# Altium PCB diban1.PcbDoc (part 2 of 2)
Units mil, origin at the board's own origin, x right, y up, seen from the top; angles counter-clockwise.
Board outline 3145.03 x 2732.03 mil, 2 copper layers (Top Layer, Bottom Layer); 163 components, 145 nets, 662 pads, 182 vias.
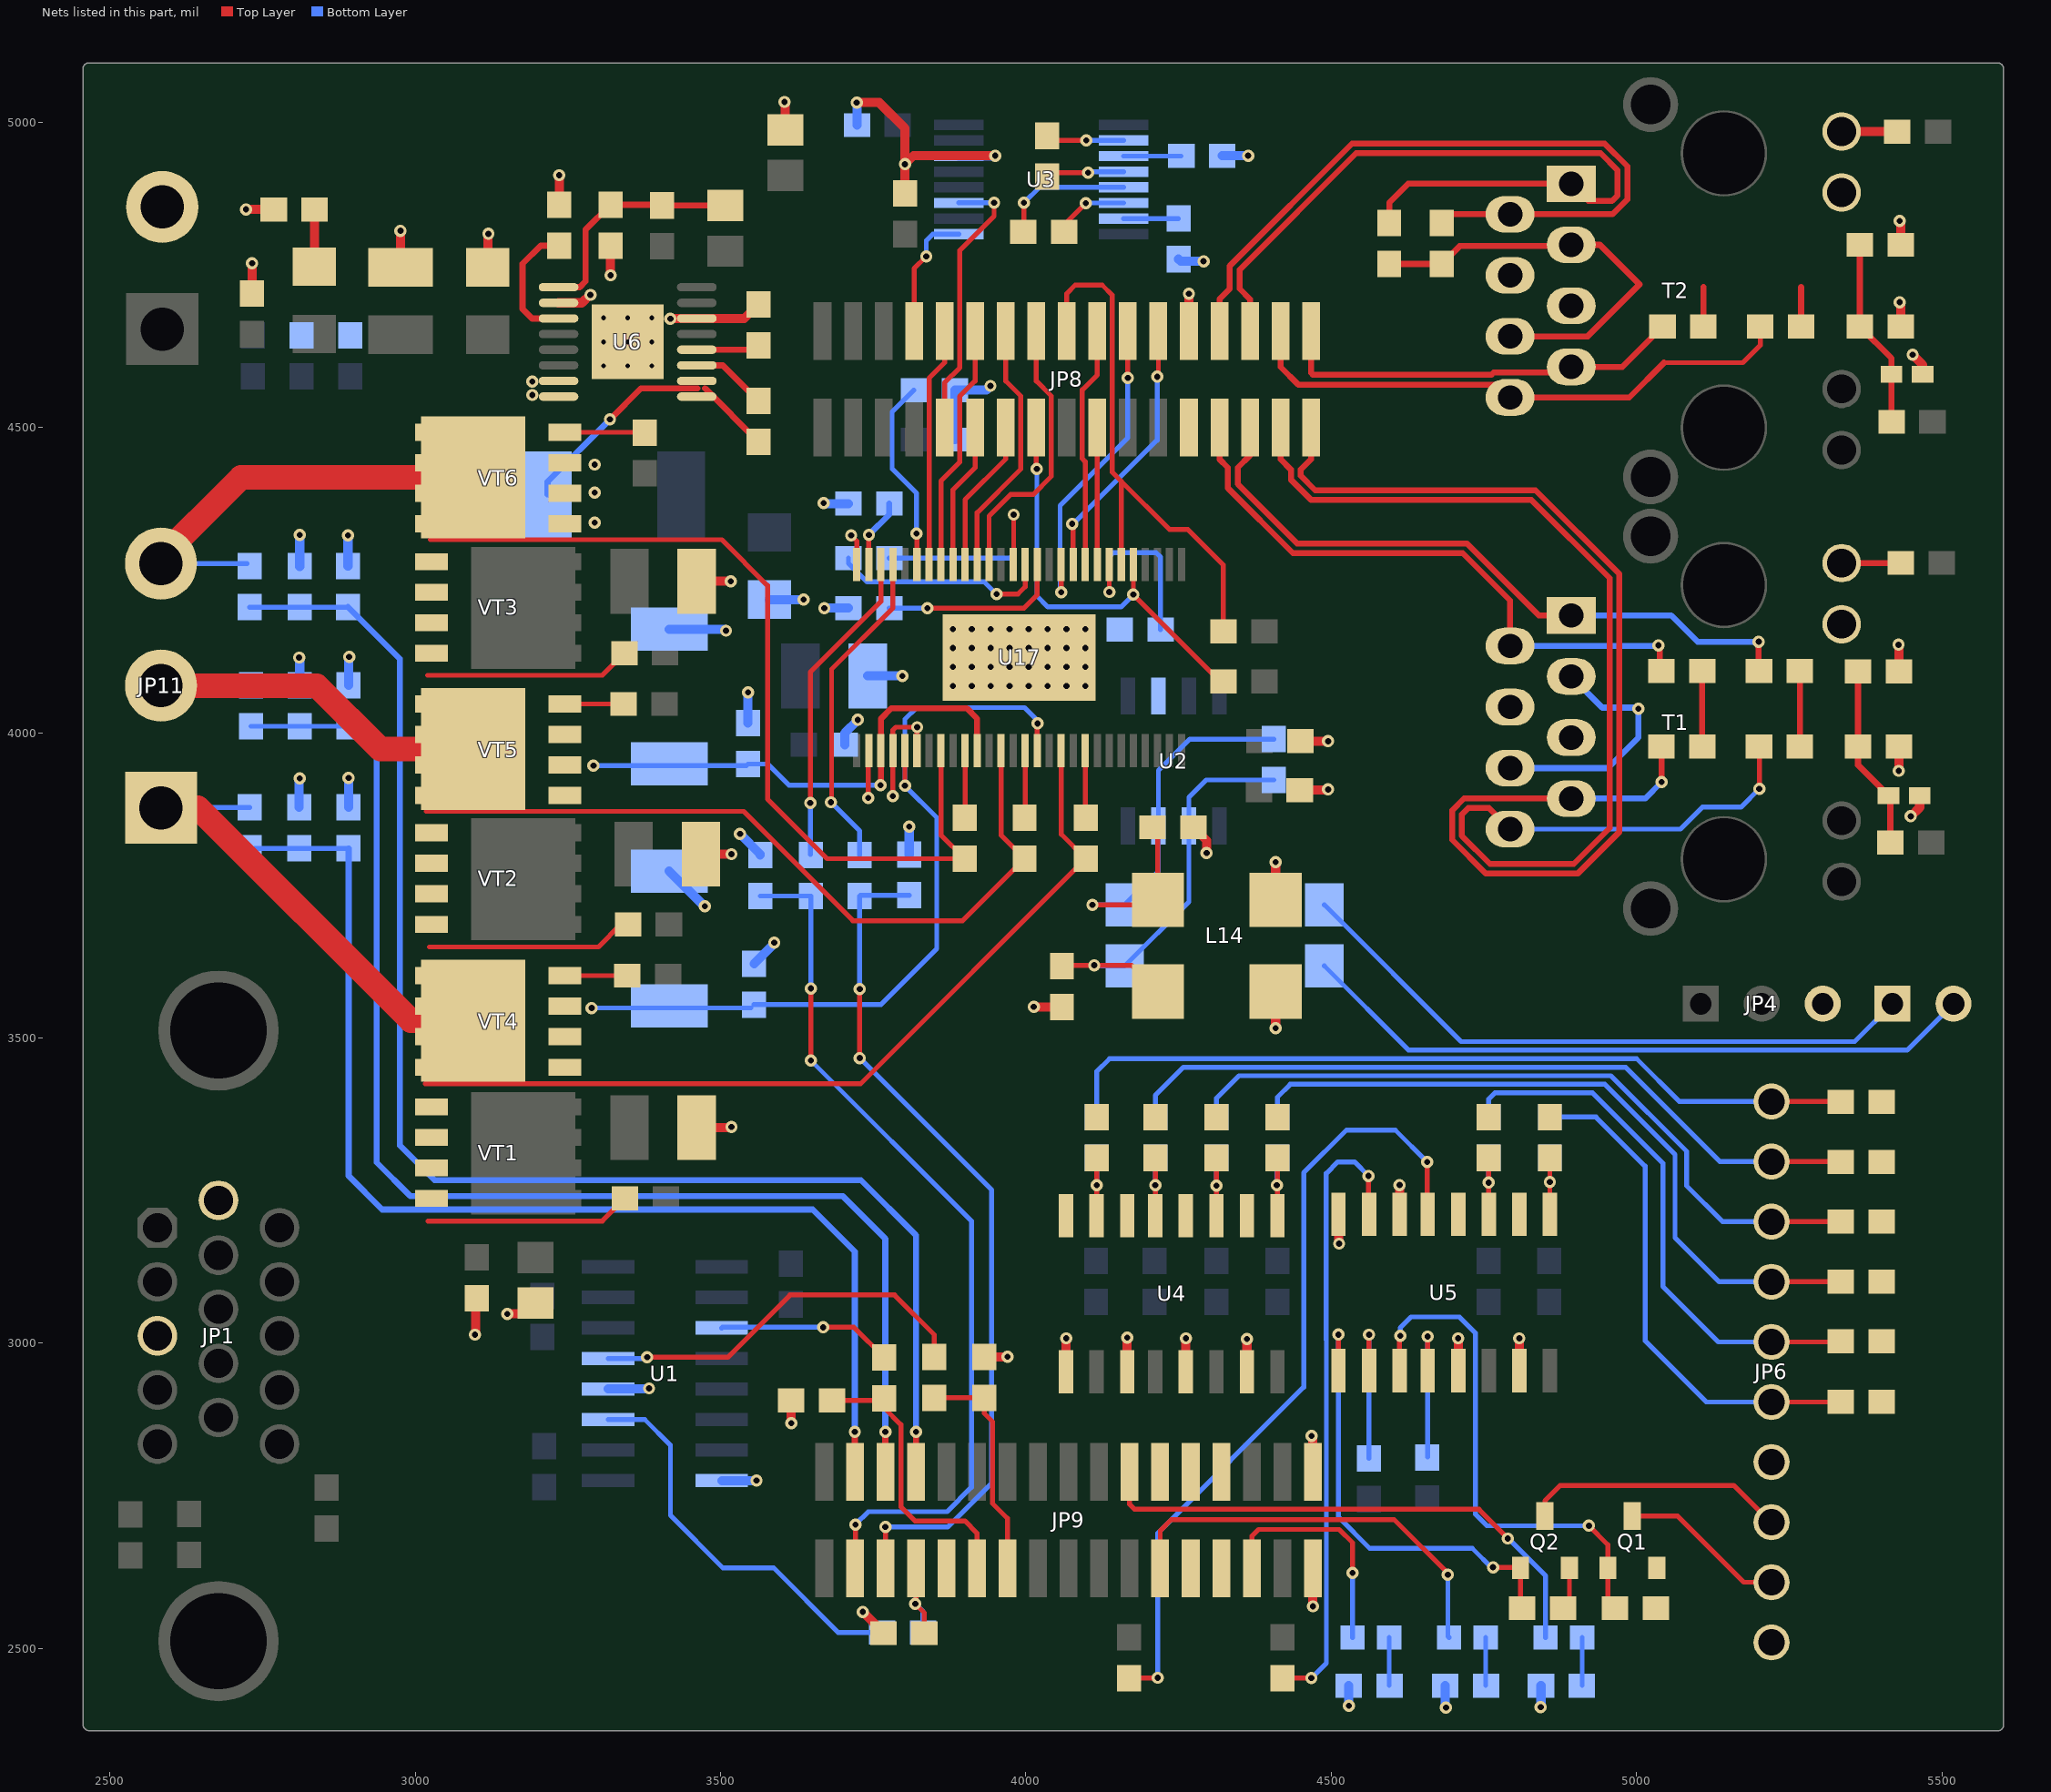
[diagram p2: the nets of this part, all layers, seen from the top]

## Via types
v1: diameter 20, hole 10, Top Layer to Bottom Layer, 167 vias
v2: diameter 40, hole 20, Top Layer to Bottom Layer, 15 vias

## Nets (pads, with @x,y where several pads share a name; then routed paths per layer and width w, separated by ;. In a path a pad name is that pad's centre, name@x,y a point inside that pad or via, vN(x,y) a via of type N, cw(c..) or ccw(c..) an arc to the next point about the centre after c; other vN are vias at no path point) (continued)
GND: C1.1 C2.1 C3.1 C4.2 C5.1 C6.1 C7.1 C8.1 C9.1 C10.2 C11.1 C12.2 C14.1 C15.1 C17.2 C18.2 C19.2 C22.1 C23.1 C26.1 C28.1 C29.1 C30.1 C31.1 C42.1 C43.1 C44.2 C45.2 C46.2 C47.2 C48.2 C49.1 C50.1 C51.1 C52.1 C53.1 C54.1 C57.1 C58.1 C65.1 C66.1 C67.1 C68.1 D1.1 D2.1 JP1.3 JP1.6 JP4.3 JP5.2 JP8.25 JP8.26 JP9.1 JP9.2 R48.2 R54.1 R55.1 R56.1 R60.1 R61.1 R70.1 R71.1 R73.1 R75.1 R77.1 R80.1 T1.4 T1.5 T1.10 T2.4 T2.5 T2.10 U1.8 U1.12 U2.2 U3.14 U4.9 U4.11 U4.13 U4.15 U5.6 U5.8 U5.13 U5.15 U6.6 U6.10 U6.15 U6.16 U6.17 U17.28 U17.30 U17.32 U17.34 U17.57 VT6.1 | length 4260.1
  Top Layer w8: v1(3714,4323) 3723.25,4313.75 U17.28@3723.25,4275.5 ; v1(3742,3893) 3742,3969.56 U17.30@3742.94,3970.5 ; v1(3782,3896) 3782,3927 3782.31,3927.31 U17.32@3782.31,3970.5 3782.31,4004.31 3787,4009 v1(3822,4009) 3821.68,4008.68 U17.34@3821.68,3970.5
  Top Layer w15: v1(2723,4857) C54.1@2768.54,4857 ; C53.1@2733,4719.46 v1(2733,4769) ; C17.2@2976,4762.12 v1(2976,4822) ; v1(3098,3014) 3099,3015 3099,3071.54 C3.1@3101,3073.54 ; C18.2@3119,4762.12 3119,4816 v1(3120,4817) ; v1(3151,3048) 3179.4,3048 C58.1@3197,3065.6 ; U6.10@3234.81,4703.98 3272.98,4703.98 3286,4717 v1(3287,4717) ; C57.1@3236,4864.46 v1(3236,4913) ; v1(3320,4749) R48.2@3320,4797.54 ; v1(3418,4678) 3418.39,4678.39 U6.6@3461.19,4678.39 3538.93,4678.39 C19.2@3562,4701.46 ; C44.2@3461.12,3353 3517,3353 v1(3518,3354) ; C46.2@3461.12,4248 v1(3517,4248) ; C45.2@3468.12,3801 v1(3518,3801) ; v1(3605,5033) 3606,5032 C22.1@3606,4987.4 ; C4.2@3615.54,2906 3615.54,2869.46 v1(3616,2869) ; v1(3723,5032) 3760,5032 3802,4990 v1(3802,4931) ; v1(3733,2560) 3766.67,2526.33 C6.1@3766.67,2525 ; C7.1@3802,4883.46 v1(3802,4931) ; C5.1@3932,2977.46 3969.46,2977.46 v1(3970,2978) ; v1(3949.77,4945) 3816,4945 v1(3802,4931) ; v1(4013,3551) 4013.46,3550.54 C11.1@4059,3550.54 ; U4.9@4065.94,2953.09 4065.94,3007.94 v1(4066,3008) ; U4.11@4165.94,2953.09 4165.94,3008.94 v1(4166,3009) ; U4.13@4262,2953.09 v1(4262,3008) ; JP8.26@4267,4658 v1(4267,4719) ; C10.2@4274.46,3845 4296,3823.46 v1(4296,3803) ; U4.15@4362,2953.09 v1(4362,3007) ; v1(4409,3516) D2.1@4409,3576 ; D1.1@4409,3726 v1(4409,3788) ; C9.1@4448.46,3906 4494,3906 v1(4495,3907) ; C8.1@4449.46,3986 v1(4495,3986) ; v1(4468,2848) 4470,2846 JP9.1@4470,2789 ; v1(4470,2569) JP9.2@4470,2631 ; U5.8@4511.94,3211 4511.94,3164.06 v1(4513,3163) ; U5.6@4611.94,3211 v1(4611.94,3259.06) ; U5.13@4708,2955.09 v1(4708,3008) ; U5.15@4808,2955.09 v1(4808,3008) ; v1(5429,4144) 5429.46,4143.54 C1.1@5429.46,4100 ; v1(5429.46,3937.46) C67.1@5429.46,3977 ; v1(5431,4705) 5432.46,4703.54 C68.1@5432.46,4665 ; v1(5431,4838) 5432.46,4836.54 C2.1@5432.46,4799 ; v1(5449,3863) 5463.59,3877.59 C65.1@5463.59,3897 ; v1(5452,4619) 5468.59,4602.41 C66.1@5468.59,4587
  Bottom Layer w15: R73.1@2810,3877.46 2810,3924 v1(2811,3925) ; v1(2810,4123) 2811,4122 R75.1@2811,4077.46 ; R77.1@2811,4272.46 v1(2811,4324) ; C51.1@2890,4272.6 v1(2890,4323) ; C49.1@2891,3877.46 v1(2891,3926) ; C50.1@2891,4077.46 2891,4123 v1(2892,4124) ; v1@3286.08,4717.92 v1(3287,4717) ; U1.12@3316,2925 3382,2925 v1(3383,2926) ; R70.1@3416,3773.24 3474.24,3715 v1(3474.24,3715.76) ; R71.1@3416,4169.24 3506.76,4169.24 v1(3509,4167) ; U1.8@3502,2775 v1(3559,2775) ; v1(3532,3834) 3565,3801 C30.1@3565,3799.46 ; C48.2@3545,4015.46 v1(3545,4066) ; C47.2@3555,3621.46 3588,3654.46 v1(3588,3656) ; C23.1@3580,4217.88 3635.88,4217.88 v1(3636,4218) ; v1(3669,4376) 3670,4375 C29.1@3709.4,4375 ; v1(3670,4204) C26.1@3709.54,4204 ; C42.1@3703.46,3980 3703.46,3999.46 v1(3725,4021) ; v1(3723,5032) 3723.4,5031.6 C14.1@3723.4,4995 ; C43.1@3741.12,4093 v1(3798,4093) ; C31.1@3809,3800.6 v1(3809,3846) ; R60.1@3883.46,4480 3883.6,4480.13 C28.1@3883.6,4561 3935,4561 v1(3942,4568) ; U3.14@3890,4944.39 3950.39,4944.39 v1(3949.77,4945) ; C12.2@4250,4775.54 4253.54,4772 v1(4291,4772) ; C15.1@4321.6,4945 v1(4364,4945) ; R54.1@4528.54,2439 4528.54,2406.46 v1(4529,2406) ; R55.1@4686.54,2439 4686.54,2404.46 v1(4688,2403) ; v1(4843,2404) 4843.54,2404.54 R56.1@4843.54,2439
  other v1: 3294,4344 3294,4393 3294,4439 3192,4553 3192,4575
GND1: C59.1 C60.1 C61.1 C62.1 C63.2 C64.2 JP6.4 R32.2 R33.2 R34.2 R35.2 R36.1 R37.1 U4.2 U4.4 U4.6 U4.8 U5.2 U5.4
GND2: JP6.1 Q1.2 Q2.2 R85.2 R86.2 | length 70.4
  Top Layer w8: R86.2@4879.46,2566 4890,2576.54 Q2.2@4890,2632
IA: C31.2 JP9.30 R62.1 | length 1400.7
  Top Layer w8: v1(3728,3467) v1(3728,3580) ; JP9.30@3770,2633 v1(3770,2699)
  Bottom Layer w8: v1(3728,3467) 3944,3251 3944,2771 3872,2699 v1(3770,2699) ; v1(3728,3580) R62.1@3728,3732.54 ; R62.1@3729.13,3733.67 C31.2@3809,3733.67
IB: C30.2 JP9.32 R63.1 | length 1446.7
  Top Layer w8: v1(3648,3463) v1(3648,3581) ; JP9.32@3721,2632 v1(3721,2703)
  Bottom Layer w8: C30.2@3565,3732.54 R63.1@3648,3732.54 v1(3648,3581) ; v1(3648,3463) 3911,3200 3911,2764 3871,2724 3742,2724 v1(3721,2703)
INH_A: JP8.16 U17.17 | length 456.5
  Top Layer w8: U17.17@3939.79,4275.5 3939.79,4354.79 3975,4390 4012,4390 4041.57,4419.57 4041.57,4551.39 4017,4575.95 JP8.16@4017,4658
INH_B: JP8.13 U17.19 | length 252.1
  Top Layer w8: U17.19@3900.42,4275.5 3900.42,4381.42 3967,4448 JP8.13@3967,4500
INH_C: JP8.12 U17.21 | length 405.7
  Top Layer w8: U17.21@3861.05,4275.5 3861.05,4412.24 3891.57,4442.76 3891.57,4550.52 3917,4575.95 JP8.12@3917,4658
INL_A: JP8.14 U17.18 | length 422.3
  Top Layer w8: U17.18@3920.1,4275.5 3920.1,4360.1 3991.57,4431.57 3991.57,4551.39 3967,4575.95 JP8.14@3967,4658
INL_B: JP8.11 U17.20 | length 239.5
  Top Layer w8: U17.20@3880.73,4275.5 3880.73,4397.73 3917,4434 JP8.11@3917,4500
INL_C: JP8.10 U17.22 | length 392.8
  Top Layer w8: U17.22@3841.57,4275.7 3841.57,4580.57 3867,4606 JP8.10@3867,4658
INPUT1: C59.2 JP6.7 R46.2 | length 1177.6
  Top Layer w8: JP6.7@5221,3100.55 5334.09,3100.55 C59.2@5334.54,3101
  Bottom Layer w8: R46.2@4412,3370.46 4412,3403 4433,3424 4948,3424 5063,3309 5063,3173 5135.45,3100.55 JP6.7@5221,3100.55
INPUT2: C60.2 JP6.8 R23.2 | length 1200.2
  Top Layer w8: JP6.8@5221,3198.98 C60.2@5334.54,3199
  Bottom Layer w8: R23.2@4312,3370.46 4312,3401 4349,3438 4958,3438 5082,3314 5082,3258 5141.02,3198.98 JP6.8@5221,3198.98
INPUT3: C61.2 JP6.9 R24.2 | length 1240.8
  Top Layer w8: JP6.9@5221,3297.4 C61.2@5334.13,3297.4
  Bottom Layer w8: R24.2@4212,3370.46 4212,3406 4258,3452 4982,3452 5136.6,3297.4 JP6.9@5221,3297.4
INPUT4: C62.2 JP6.10 R25.2 | length 1330
  Top Layer w8: JP6.10@5221,3395.83 C62.2@5333.71,3395.83
  Bottom Layer w8: R25.2@4116,3370.46 4116,3445 4137,3466 5000,3466 5070.17,3395.83 JP6.10@5221,3395.83
INPUT5: C63.1 JP6.5 R30.2 | length 837.1
  Top Layer w8: JP6.5@5221,2903.7 C63.1@5334.24,2903.7
  Bottom Layer w8: R30.2@4858,3370.46 4933.54,3370.46 5014,3290 5014,3004 5114.3,2903.7 JP6.5@5221,2903.7
INPUT6: C64.1 JP6.6 R31.2 | length 896.6
  Top Layer w8: JP6.6@5221,3002.13 C64.1@5333.66,3002.13
  Bottom Layer w8: R31.2@4758,3370.46 4758,3400 4768,3410 4928,3410 5043,3295 5043,3093 5133.87,3002.13 JP6.6@5221,3002.13
LED1: JP9.6 LED1.1 | length 386.7
  Top Layer w8: JP9.6@4370,2631 4370,2684 4381,2695 4513,2695 4535,2673 v1(4535,2624)
  Bottom Layer w8: LED1.1@4535,2518 v1(4535,2624)
LED2: JP9.12 LED2.1 | length 685.6
  Top Layer w8: JP9.12@4220,2631 4220,2693 4238,2711 4603,2711 4693,2621 v1(4691,2621)
  Bottom Layer w8: v1(4691,2621) 4691,2520 LED2.1@4693,2518
LED3: JP9.13 LED3.1 | length 884
  Top Layer w8: JP9.13@4170,2789 4170,2736 4178,2728 4742,2728 4789,2681 v1(4789,2680)
  Bottom Layer w8: v1(4789,2680) 4790,2680 4851,2619 LED3.1@4851,2518
MCU_TCK: JP9.7
MCU_TDI: JP9.11
MCU_TDO: JP9.8
MCU_TMS: JP9.10
MCU_TRST: JP9.9
NetC10_1: C10.1 D1.2 L14.2 R22.2 U2.7 | length 727.7
  Top Layer w8: v1(4109,3718) D1.2@4208.09,3718 ; C10.1@4207.54,3845 4216.09,3836.45 D1.2@4216.09,3726
  Bottom Layer w8: v1(4109,3718) L14.2@4162,3718 4217,3773 U2.7@4217,3847.4 4217,3938 4268.46,3989.46 R22.2@4406,3989.46
NetC11_2: C11.2 D2.2 L14.1 R22.1 U2.6 | length 696.1
  Top Layer w8: C11.2@4060.54,3619 v1(4112,3619) 4173.09,3619 D2.2@4216.09,3576
  Bottom Layer w8: v1(4112,3619) 4111,3618 L14.1@4162,3618 4267,3723 U2.6@4267,3847.4 4267,3894 4295.54,3922.54 R22.1@4406,3922.54
NetC12_1: C12.1 U3.7 | length 89.6
  Bottom Layer w8: U3.7@4160,4842.02 C12.1@4249.56,4842.02
NetC13_1: C13.1 U3.2 | length 128.1
  Top Layer w8: C13.1@4035,4977.46 4042.46,4970 v1(4099,4970)
  Bottom Layer w8: v1(4099,4970) U3.2@4160,4969.98
NetC13_2: C13.2 U3.4 | length 128.4
  Top Layer w8: C13.2@4035,4910.54 4041.46,4917 v1(4102,4917)
  Bottom Layer w8: v1(4102,4917) 4103.8,4918.8 U3.4@4160,4918.8
NetC15_2: C15.2 U3.3 | length 94.1
  Bottom Layer w8: U3.3@4160,4944.39 C15.2@4254.06,4944.39
NetC16_1: C16.1 U3.5 | length 222
  Top Layer w8: C16.1@3995.54,4820 3997,4821.46 v1(3997,4868)
  Bottom Layer w8: v1(3997,4868) 4022.2,4893.2 U3.5@4160,4893.2
NetC16_2: C16.2 U3.6 | length 124
  Top Layer w8: C16.2@4062.46,4820 4062.46,4831.46 v1(4098,4867)
  Bottom Layer w8: v1(4098,4867) 4098.61,4867.61 U3.6@4160,4867.61
NetC19_1: C19.1 U6.4 | length 103.8
  Top Layer w10: U6.4@3461.19,4627.2 3554.66,4627.2 C19.1@3562,4634.54
NetC20_1: C20.1 U6.3 | length 151.5
  Top Layer w10: U6.3@3434.61,4601.61 U6.3@3461.19,4601.61 3503.85,4601.61 C20.1@3562,4543.46
NetC20_2: C20.2 L1.1 U6.1 U6.2 | length 453.1
  Top Layer w10: v1(3319,4513) 3370,4564 3462,4564 ; 3474.54,4564 C20.2@3562,4476.54
  Bottom Layer w10: L1.1@3217,4390 3217,4411 v1(3319,4513)
NetC21_1: C21.1 R47.2 R48.1 U6.9 | length 377.5
  Top Layer w10: U6.9@3234.81,4729.57 3269.57,4729.57 3279,4739 3279,4823.46 R48.1@3320,4864.46 R47.2@3403,4864.46 ; R47.2@3404,4863.46 C21.1@3507.94,4863.46
NetC26_2: C26.2 U17.13 | length 300.9
  Top Layer w8: v1(3839,4204) 3839.06,4204.06 3997,4204.06 4018.53,4225.59 U17.13@4018.53,4275.5
  Bottom Layer w8: C26.2@3776.46,4204 v1(3839,4204)
NetC27_1: C27.1 U17.15 | length 352.9
  Top Layer w8: U17.15@3979.16,4275.5 3980,4276.34 v1(3980,4357)
  Bottom Layer w8: C27.1@3776.46,4286 3974,4286 3980,4292 v1(3980,4357)
NetC27_2: C27.2 U17.14 | length 360.3
  Top Layer w8: v1(3952,4227) 3987,4227 3998.84,4238.84 U17.14@3998.84,4275.5
  Bottom Layer w8: C27.2@3709.54,4286 3709.54,4277.46 3740,4247 3932,4247 v1(3952,4227)
NetC28_2: C28.2 U17.23 | length 318.5
  Top Layer w8: U17.23@3821.68,4275.5 v1@3821.68,4327.65
  Bottom Layer w8: C28.2@3816.67,4561 3781,4525.33 3781,4432 3821,4392 v1(3821,4326)
NetC29_2: C29.2 U17.27 | length 113.4
  Top Layer w8: U17.27@3742.94,4275.5 v1@3742.94,4324.06
  Top Layer w10: v1@3742.94,4324.06 v1(3743.06,4324.06)
  Bottom Layer w10: v1(3743.06,4324.06) 3776.33,4357.33 C29.2@3776.33,4375
NetC39_1: C39.1 U17.48 | length 109.3
  Top Layer w8: C39.1@4097.27,3861.2 U17.48@4097.27,3970.5
NetC40_1: C40.1 U17.43 | length 109.2
  Top Layer w8: C40.1@3998.84,3861.31 U17.43@3998.84,3970.5
NetC41_1: C41.1 U17.38 | length 109.6
  Top Layer w8: C41.1@3900.42,3860.88 U17.38@3900.42,3970.5
NetC54_2: C54.2 R79.1 | length 93.4
  Top Layer w15: R79.1@2835.46,4763.58 C54.2@2835.46,4857
NetC57_2: C57.2 U6.11 | length 211.5
  Top Layer w10: U6.11@3234.81,4678.39 3191.61,4678.39 3176,4694 3176,4768 3205.54,4797.54 C57.2@3236,4797.54
NetJP3_1: JP3.1 L14.3 | length 1048.7
  Bottom Layer w8: L14.3@4488.77,3718 4712.77,3494 5357,3494 JP3.1@5419,3556
NetJP3_2: JP3.2 L14.4 | length 1118.9
  Bottom Layer w8: L14.4@4488.77,3618 4626.77,3480 5443,3480 JP3.2@5519,3556
NetJP6_2: JP6.2 Q1.3 | length 273
  Top Layer w8: Q1.3@4993,2717 5067,2717 5175.57,2608.43 JP6.2@5221,2608.43
NetJP6_3: JP6.3 Q2.3 | length 432
  Top Layer w8: Q2.3@4850,2717 4850,2742 4875,2767 5159.15,2767 5220.15,2706 JP6.3@5221,2706.85
NetLED1_2: LED1.2 R54.2 | length 78.5
  Bottom Layer w8: R54.2@4595,2439.46 LED1.2@4595,2518
NetLED2_2: LED2.2 R55.2 | length 78.5
  Bottom Layer w8: R55.2@4753,2439.46 LED2.2@4753,2518
NetLED3_2: LED3.2 R56.2 | length 78.5
  Bottom Layer w8: R56.2@4911,2439.54 LED3.2@4911,2518
NetQ1_1: Q1.1 R85.1 U5.11 | length 856.5
  Top Layer w8: U5.11@4611.94,2955.09 4611.94,3010.94 v1(4613,3012) ; v1(4922,2701) 4953,2670 Q1.1@4953,2632 4953,2577.54 R85.1@4964.54,2566
  Bottom Layer w8: v1(4613,3012) 4613,3025 4631,3043 4710,3043 4736,3017 4736,2720 4755,2701 v1(4922,2701) v1@4921,2700
NetQ2_1: Q2.1 R86.1 U5.9 | length 758.1
  Top Layer w8: U5.9@4511.94,2955.09 v1(4511.94,3014.06) ; v1(4765,2633) 4809,2633 Q2.1@4810,2632 R86.1@4810,2568.54
  Bottom Layer w8: v1(4511.94,3014.06) 4511.94,2715.06 4563,2664 4731,2664 4765,2630 v1(4765,2633)
NetR9_2: R9.2 T1.9 | length 96.3
  Top Layer w10: T1.9@5335.91,4277.63 R9.2@5432.17,4277.63
NetR10_2: R10.2 T2.9 | length 90
  Top Layer w15: T2.9@5335.91,4984.63 R10.2@5425.91,4984.63
NetR14_2: R14.2 U1.3 | length 286.9
  Top Layer w8: v1(3668,3026) 3718.46,3026 R14.2@3768,2976.46
  Bottom Layer w8: U1.3@3502,3025 3503,3026 v1(3668,3026)
NetR15_2: R15.2 U1.13 | length 640.5
  Top Layer w8: v1(3380,2977) 3512,2977 3614,3079 3785,3079 3850,3014 R15.2@3850,2977.46
  Bottom Layer w8: U1.13@3316,2975 3378,2975 v1(3380,2977)
NetR16_2: R16.2 U1.11 | length 660.5
  Bottom Layer w8: U1.11@3316,2875 3376,2875 3418,2833 3418,2718 3504,2632 3587,2632 3693,2526 R16.2@3764.54,2526
NetR23_1: R23.1 R33.1 U4.3 | length 140.1
  Top Layer w8: U4.3@4312,3209 v1(4312,3258) R33.1@4312,3303.54
  Bottom Layer w8: v1(4312,3258) R23.1@4312,3303.54
NetR24_1: R24.1 R34.1 U4.5 | length 139.1
  Top Layer w8: U4.5@4212,3209 v1(4212,3259) R34.1@4212,3303.54
  Bottom Layer w8: v1(4212,3259) R24.1@4212,3303.54
NetR25_1: R25.1 R35.1 U4.7 | length 139.1
  Top Layer w8: U4.7@4115.94,3209 4115.94,3258.94 v1(4116,3259) R35.1@4116,3303.54
  Bottom Layer w8: v1(4116,3259) R25.1@4116,3303.54
NetR30_1: R30.1 R36.2 U5.1 | length 132.1
  Top Layer w8: U5.1@4858,3211 v1(4858,3264) R36.2@4858,3303.54
  Bottom Layer w8: v1(4858,3264) R30.1@4858,3303.54
NetR31_1: R31.1 R37.2 U5.3 | length 133.1
  Top Layer w8: U5.3@4758,3211 v1(4758,3263) R37.2@4758,3303.54
  Bottom Layer w8: v1(4758,3263) R31.1@4758,3303.54
NetR32_1: R32.1 R46.1 U4.1 | length 138.1
  Top Layer w8: U4.1@4412,3209 R32.1@4412,3303.54
  Bottom Layer w8: v1(4411,3259) R46.1@4411,3302.54
NetR40_1: R40.1 U5.12 | length 253.4
  Top Layer w8: U5.12@4658,2955.09 v1(4658,3011)
  Bottom Layer w8: R40.1@4658,2813.46 v1(4658,3011)
NetR41_1: R41.1 U5.10 | length 261.5
  Top Layer w8: U5.10@4561.94,2955.09 4561.94,3013.94 v1(4562,3014)
  Bottom Layer w8: R41.1@4562,2811.46 v1(4562,3014)
NetR42_1: R42.1 U5.5 | length 1310.7
  Top Layer w8: R42.1@4169,2451.54 4215.54,2451.54 v1(4216,2452) ; U5.5@4657,3212 v1(4657,3297)
  Bottom Layer w8: v1(4216,2452) 4216,2689 4455,2928 4455,3279 4525,3349 4605,3349 v1(4657,3297)
NetR43_1: R43.1 U5.7 | length 1032.6
  Top Layer w8: R43.1@4420,2451.54 v1(4467.54,2451.54) ; U5.7@4561,3211.94 v1(4561,3274)
  Bottom Layer w8: v1(4467.54,2451.54) 4492,2476 4492,3005.72 4491.94,3005.78 4491.94,3277.94 4511,3297 4538,3297 v1(4561,3274)
NetR61_2: R61.2 U17.7 | length 311.5
  Top Layer w8: v1(4136.64,4230.36) U17.7@4136.64,4275.5
  Bottom Layer w8: v1(4136.64,4230.36) 4136.64,4288.64 4143,4295 4213,4295 4220.5,4287.5 4220.46,4287.46 R61.2@4220.46,4169
NetR62_2: R62.2 U17.25 | length 537.5
  Top Layer w8: v1(3681,3886) 3682,3887 3682,4104 3782.31,4204.31 U17.25@3782.31,4275.5
  Bottom Layer w8: v1(3681,3886) 3728,3839 R62.2@3728,3799.46
NetR63_2: R63.2 U17.26 | length 522.9
  Top Layer w8: v1(3647,3885) 3647,4099 3762.62,4214.62 U17.26@3762.62,4275.5
  Bottom Layer w8: R63.2@3647,3800.46 v1(3647,3885)
NetR64_1: R64.1 VT1.4 | length 337.9
  Top Layer w8: 3021,3200 3306.54,3200 R64.1@3343.54,3237
NetR65_1: R65.1 VT2.4 | length 340.9
  Top Layer w8: 3023,3649 3300,3649 3337,3686 R65.1@3348.54,3686
NetR66_1: R66.1 VT3.4 | length 337.4
  Top Layer w8: 3020,4094 3306.54,4094 R66.1@3342.54,4130
NetR67_1: R67.1 VT4.4 | length 102.5
  Top Layer w8: VT4.4@3245.06,3602 R67.1@3347.54,3602
NetR68_1: R68.1 VT5.4 | length 96.5
  Top Layer w8: VT5.4@3245.06,4047 R68.1@3341.54,4047
NetR69_1: R69.1 VT6.4 | length 130.4
  Top Layer w8: VT6.4@3245.06,4492 R69.1@3375.46,4492
NFAULT: JP8.18 R51.1 U17.6 | length 927.8
  Top Layer w8: JP8.18@4067,4658 4067,4719 4081,4733 4125,4733 4141.57,4716.43 4141.57,4426.43 4156.32,4411.68 ; U17.6@4156.32,4275.5 4156.32,4411.68 ; R51.1@4323.54,4166 4323.54,4274.46 4265,4333 4235,4333 4156.32,4411.68
NOCTW: JP8.15 R52.1 U17.5 | length 706.6
  Top Layer w8: JP8.15@4017,4500 4017,4432 v1(4018,4432) ; U17.5@4176.01,4275.5 v1(4176,4226) 4318,4084 R52.1@4323.54,4084
  Bottom Layer w8: v1(4018,4432) 4018,4224 4036,4206 4156,4206 v1(4176,4226)
QEP1A: C4.1 JP9.24 R14.1 | length 471.2
  Top Layer w8: C4.1@3682.46,2906 R14.1@3764.46,2906 ; R14.1@3768,2909.54 3768,2894 3795.43,2866.57 3795.43,2732.05 3818.48,2709 3900,2709 3920,2689 JP9.24@3920,2631
QEP1B: C5.2 JP9.22 R15.1 | length 377.3
  Top Layer w8: R15.1@3850,2910.54 C5.2@3932,2910.54 3932,2885 3945.43,2871.57 3945.43,2737.61 3970,2713.05 JP9.22@3970,2631
QEP1I: C6.2 JP9.28 R16.1 | length 164.6
  Top Layer w8: JP9.28@3820,2631 3820,2574 v1(3819,2573) 3833.6,2558.4 C6.2@3833.6,2525
  Bottom Layer w8: v1(3819,2573) 3831.46,2560.54 R16.1@3831.46,2526
QEP1S: JP9.26
RXA_N: JP8.31 R4.1 T1.8 | length 2013
  Top Layer w8: R4.1@5200.54,3977 5201,3976.54 v1(5201,3908)
  Top Layer w9.7: JP8.31@4417,4500 4417,4447.91 4434,4430.91 4434,4414.37 4467.37,4381 4828,4381 4956,4253 4956,3844 4897,3785 4760,3785 4714,3831 4714,3866 4724.31,3876.31 4758.69,3876.31 T1.8@4793,3842
  Bottom Layer w8: T1.8@4793,3842 5072,3842 5108,3878 5171,3878 v1(5201,3908)
RXA_P: JP8.33 R3.1 T1.7 | length 1891.3
  Top Layer w9.7: JP8.33@4467,4500 4467,4447.91 4450,4430.91 4450,4421 4474,4397 4834.63,4397 4972,4259.63 4972,3837.37 4903.63,3769 4753.37,3769 4698,3824.37 4698,3872.63 4717.69,3892.31 4892.69,3892.31 T1.7@4893,3892 ; R3.1@5040.54,3977 5041,3976.54 v1(5041,3919)
  Bottom Layer w9.7: T1.7@4893,3892 5014,3892 v1(5041,3919)
RXB_N: JP8.32 R8.1 T2.8 | length 931.1
  Top Layer w8: 5045,4606 5174,4606 5202.54,4634.54 R8.1@5202.54,4665
  Top Layer w9.7: JP8.32@4417,4658 4417,4599 4446,4570 4772,4570 T2.8@4793,4549 4988,4549 5045,4606
RXB_P: JP8.34 R7.1 T2.7 | length 678.5
  Top Layer w9.7: JP8.34@4467,4658 4467,4589 4470,4586 4762.23,4586 4766.08,4589.85 4883.85,4589.85 T2.7@4893,4599 4976.54,4599 R7.1@5042.54,4665
S1_N: C47.1 R70.2 U17.33 U17.44 VT4.1 | length 1339.6
  Top Layer w8: v1(3802,3913) U17.33@3802,3967.49 ; U17.44@4018.53,3970.5 4018.53,4018.47 4019,4018 v1(4019,4015)
  Bottom Layer w8: v1(3289,3549) C47.1@3549.46,3549 ; C47.1@3555,3554.54 3762.54,3554.54 3854,3646 3854,3861 v1(3802,3913) 3802,4022 3821,4041 3998,4041 4019,4020 v1(4019,4015)
S2_N: C48.1 R71.2 U17.31 U17.39 VT5.1 | length 814.8
  Top Layer w10: v1(3762,3914) 3762.62,3914.62 U17.31@3762.62,3970.5 3762.62,4022.62 3780,4040 3903,4040 3920.1,4022.9 U17.39@3920.1,3970.5
  Bottom Layer w8: v1(3292,3946) C48.1@3542.46,3946 ; C48.1@3545,3948.54 3577.46,3948.54 3612,3914 v1(3762,3914)
SCI_RXD: JP8.8 U3.9 | length 213.6
  Top Layer w8: JP8.8@3817,4658 3817,4760 v1(3837,4780)
  Bottom Layer w8: v1(3837,4780) 3837,4806 3847.43,4816.43 U3.9@3890,4816.43
SCI_TXD: JP8.9 U3.11 | length 459.7
  Top Layer w8: JP8.9@3867,4500 3867,4573 3892,4598 3892,4790 3948,4846 v1(3948,4868)
  Bottom Layer w8: U3.11@3890,4867.61 3890.39,4868 v1(3948,4868)
SH_A: C39.2 JP11.1 R72.1 U17.46 VT1.1 VT4.5 | length 2247.3
  Top Layer w8: 3017,3425 3729.46,3425 C39.2@4098,3793.54 4057.9,3833.64 U17.46@4057.9,3970.5
  Top Layer w40: JP11.1@2574,3877 2644,3877 2993,3528 VT4.5@3095,3528
  Bottom Layer w8: JP11.1@2574.46,3877.46 R72.1@2729,3877.46
SH_B: C40.2 JP11.2 R74.1 U17.41 VT2.1 VT5.5 | length 2009.7
  Top Layer w8: 3018,3871 3537.8,3871 3716.8,3692 3896.46,3692 C40.2@3998,3793.54 3959.47,3832.06 U17.41@3959.47,3970.5
  Top Layer w40: JP11.2@2574,4077 2839,4077 2943,3973 VT5.5@3095,3973
  Bottom Layer w8: JP11.2@2574.46,4077.46 R74.1@2731,4077.46
SH_C: C41.2 JP11.3 R76.1 U17.36 VT3.1 VT6.5 | length 2219.3
  Top Layer w8: 3025,4316 3502,4316 3577,4241 3577,3891.2 3674.67,3793.54 C41.2@3900,3793.54 3861.05,3832.49 U17.36@3861.05,3970.5
  Top Layer w40: JP11.3@2574,4277 2715,4418 VT6.5@3095,4418
  Bottom Layer w8: JP11.3@2574,4277 R76.1@2724.46,4277
SPIA_CLK: JP8.22 U17.11 | length 520.5
  Top Layer w8: v1(4057.9,4229.9) U17.11@4057.9,4275.5 ; v1(4167,4581) JP8.22@4167,4658
  Bottom Layer w8: v1(4057.9,4229.9) 4056,4231.8 4056,4372 4167,4483 v1(4167,4581)
SPIA_CS: JP8.19 U17.8 | length 224.5
  Top Layer w8: U17.8@4116.95,4275.5 JP8.19@4117,4500
SPIA_SIMO: JP8.20 U17.9 | length 394.7
  Top Layer w8: U17.9@4097.27,4275.5 4097.27,4353.02 4097.27,4443.78 4092.43,4448.61 4092.43,4561.43 4117,4586 JP8.20@4117,4658
SPIA_SOMI: JP8.24 U17.10 | length 443.4
  Top Layer w8: v1(4076,4342) 4077.16,4342 4077.58,4341.58 U17.10@4077.58,4275.5 ; v1(4215,4583) 4217,4585 JP8.24@4217,4658
  Bottom Layer w8: v1(4076,4342) 4078,4342 4215,4479 v1(4215,4583)
TXA_N: JP8.27 R2.1 T1.2 | length 1003.1
  Top Layer w9.7: JP8.27@4317,4500 4317,4447.91 4330.69,4434.22 4330.69,4408.69 4331,4408.37 4331,4400.37 4437.37,4294 4715.37,4294 4793,4216.37 T1.2@4793,4142 ; v1(5036,4143) 5038,4141 5038,4103.54 R2.1@5039,4104.54
  Bottom Layer w9.7: T1.2@4793,4142 5035,4142 v1(5036,4143)
TXA_P: JP8.29 R1.1 T1.1 | length 1109.3
  Top Layer w8: R1.1@5200.54,4101 R1.1@5201,4101.46
  Top Layer w9.7: JP8.29@4367,4500 4367,4454 4347,4434 4347,4407 4444,4310 4722,4310 4840,4192 T1.1@4893,4192 ; R1.1@5200,4101.54 v1(5200,4149)
  Bottom Layer w9.7: T1.1@4893,4192 5057,4192 5100,4149 v1(5200,4149)
TXB_N: JP8.28 R6.1 T2.2 | length 1237.5
  Top Layer w9.7: JP8.28@4317,4658 4317,4710.09 4334,4727.09 4334,4764.63 4534.37,4965 4947.63,4965 4985,4927.63 4985,4873.37 4960.63,4849 T2.2@4793,4849 4695.54,4849 R6.1@4681,4834.46
TXB_P: JP8.30 R5.1 T2.1 | length 1293.5
  Top Layer w9.7: JP8.30@4367,4658 4367,4710.09 4350,4727.09 4350,4758 4541,4949 4941,4949 4969,4921 4969,4880 4960,4871 4921,4871 T2.1@4893,4899 4626,4899 4595,4868 R5.1@4595,4834.46
VA: C49.2 JP9.31 R72.2 R73.2 | length 1939.9
  Top Layer w10: JP9.31@3720,2789 v1(3720,2855)
  Bottom Layer w8: R72.2@2729,3810.54 R73.2@2810,3810.54 C49.2@2891,3810.54
  Bottom Layer w10: C49.2@2891,3810.54 2891,3274 2946,3219 3651,3219 3720,3150 v1(3720,2855)
VB: C50.2 JP9.29 R74.2 R75.2 | length 2160.4
  Top Layer w10: JP9.29@3770,2789 v1(3770,2855)
  Bottom Layer w8: R74.2@2731,4010.54 R75.2@2811,4010.54 C50.2@2891,4010.54
  Bottom Layer w10: C50.2@2891,4010.54 2937,3964.54 2937,3296 2992,3241 3700,3241 3770,3171 v1(3770,2855)
VC: C51.2 JP9.27 R76.2 R77.2 | length 2371.6
  Top Layer w10: JP9.27@3820,2789 v1(3820,2855)
  Bottom Layer w8: R76.2@2729,4205.54 R77.2@2811,4205.54 C51.2@2889.87,4205.54
  Bottom Layer w10: C51.2@2890,4205.67 2975,4120.67 2975,3324 3032,3267 3730,3267 3820,3177 v1(3820,2855)
VDD33TXRX1: C1.2 C65.2 C67.2 L3.2 R1.2 R2.2 R3.2 R4.2 T1.3 T1.6 | length 962.4
  Top Layer w10: v1(5003,4039) v1@5005,4041 ; R3.2@5107.46,3977 R2.2@5107.46,4101 ; R4.2@5267.46,3977 R1.2@5267.46,4101 ; C1.2@5362.54,4100 C67.2@5362.54,3977 5362.54,3946.87 C65.2@5412.41,3897 5415.54,3893.87 L3.2@5415.54,3820
  Bottom Layer w10: T1.6@4793,3942 4953,3942 5003,3992 v1(5003,4039) 5001,4041 4944,4041 T1.3@4893,4092
VDD33TXRX2: C2.2 C66.2 C68.2 L2.2 R5.2 R6.2 R7.2 R8.2 T2.3 T2.6 | length 1137.8
  Top Layer w10: R5.2@4595,4767.54 R6.2@4681,4767.54 4710.46,4797 4891,4797 T2.3@4893,4799 4940,4799 5005,4734 4920,4649 T2.6@4793,4649 ; R7.2@5109.46,4665 5109.46,4729.54 ; R8.2@5269.46,4665 5269.46,4729.54 ; C2.2@5365.54,4799 C68.2@5365.54,4665 5417.41,4613.13 C66.2@5417.41,4587 5417.41,4509.13 L2.2@5417.54,4509
pads on no net: JP1.10 JP1.14 JP1.15 JP1.16 JP1.17 JP9.23 JP9.33 JP9.34 T1.0 T1.11 T1.12 T1.13 T1.14 T2.0 T2.11 T2.12 T2.13 T2.14 U1.5 U1.6 U1.7 U2.5 U2.8 U3.1 U3.10 U6.7 U6.8 U17.1 U17.2 U17.3 U17.4 U17.50 U17.51 U17.52 U17.53 U17.54 U17.55 U17.56

## Polygon pours and split planes (outlines as drawn)
GND1 on Top Layer "Mechanical 1-No Net" (hatched 90Degree grid 10 track 8, remove dead copper, pour order 14): 4024,3431 4016,3423 4016,3147 4985,3147 4992,3154 5146,3000 5146,2812 5206,2752 5207,2751 5577,2751 5577,3468 5575,3470 4702,3470 4648,3470 4610,3432 4025,3432 4024,3431
GND2 on Top Layer "Mechanical 1-No Net" (hatched 90Degree grid 10 track 8, remove dead copper, pour order 10): 5581,2729 5580,2728 5580,2389 4710,2389 4707,2392 4738,2423 4738,2684 5580,2684
GND on Bottom Layer "Mechanical 1-No Net" (hatched 90Degree grid 10 track 8, remove dead copper, pour order 20): 5580,5074 5582,5072 5582,2387 2481,2387 2476,2392 2477,2393 2477,5076 5580,5076

## Other copper
Top Layer:
  rectangle net GND: 4247,4445 4286,4705
  rectangle net GND: 3218,4326 3308,4456
  rectangle net GND: 3183,4542 3267,4585
  rectangle net 48V: 3696,3924 3728,4002
  rectangle net 3V3: 3652,4543 3743,4593
  rectangle net VDD33TXRX2: 4980,4710 5386,4758
  rectangle net VDD33TXRX1: 4991,4021 5382,4059
  rectangle net 48V: 3182,4595 3267,4659
  rectangle net 5V0: 3651,4606 3735,4766
  rectangle net NetC20_2: 3425,4545 3503,4581
  rectangle net SH_C: 2996,4161 3057,4358
  rectangle net SH_B: 2994,3718 3059,3916
  rectangle net SH_A: 2994,3268 3058,3469
  rectangle net NetR65_1: 2994,3644 3058,3700
  rectangle net NetR66_1: 2995,4090 3059,4145
  rectangle net NetR64_1: 2996,3194 3056,3253
  rectangle net S1_N: 3218,3437 3304,3567
  rectangle net S2_N: 3217,3881 3304,4015
  rectangle net 3V3: 3653,4411 3732,4546
  rectangle net 48V: 3241,3303 3376,3410
  rectangle net 48V: 3246,3751 3382,3856
  rectangle net 48V: 3260,4199 3376,4299
Bottom Layer:
  rectangle net 5V0: 3569,4719 3731,4768
  rectangle net 5V0: 3570,4279 3651,4731
  rectangle net 5V0: 3497,4279 3584,4724
  rectangle net 3V3: 3839,4961 3928,5004
  rectangle net 48V: 3110,4104 3306,4302
  rectangle net 48V: 3110,3661 3316,3859
  rectangle net 48V: 3096,3301 3360,3410

## Silkscreen, mask and mechanical layers (free items; w line width, h text height)
Mechanical 1:
  lines w7.87: 4914.01,2482.01 4914.01,4878 3003.01,4878 3003.01,2498.01 3003.01,2480.01 4916.01,2480.01
  lines w20: 2466,2376 2467,2375 5482,2375 5591,2375 5591,2418 5591,4879 5591,4922 5591,5087 4832.75,5087 3270.25,5087 2466,5087 2466,4923 2466,2376

## Text inside footprints (layer, text, board x,y; h text height)
U17: Top Overlay "*" at 4266.75,4293.5 h40 r270